# Altium PCB LCD16x2.PcbDoc
Units mil, origin at the board's own origin, x right, y up, seen from the top; angles counter-clockwise.
Board outline 3425.2 x 2755.91 mil, 2 copper layers (Top Layer, Bottom Layer); 10 components, 6 nets, 139 pads, 2 vias.
Unrouted connection lines stored in the file: 2.
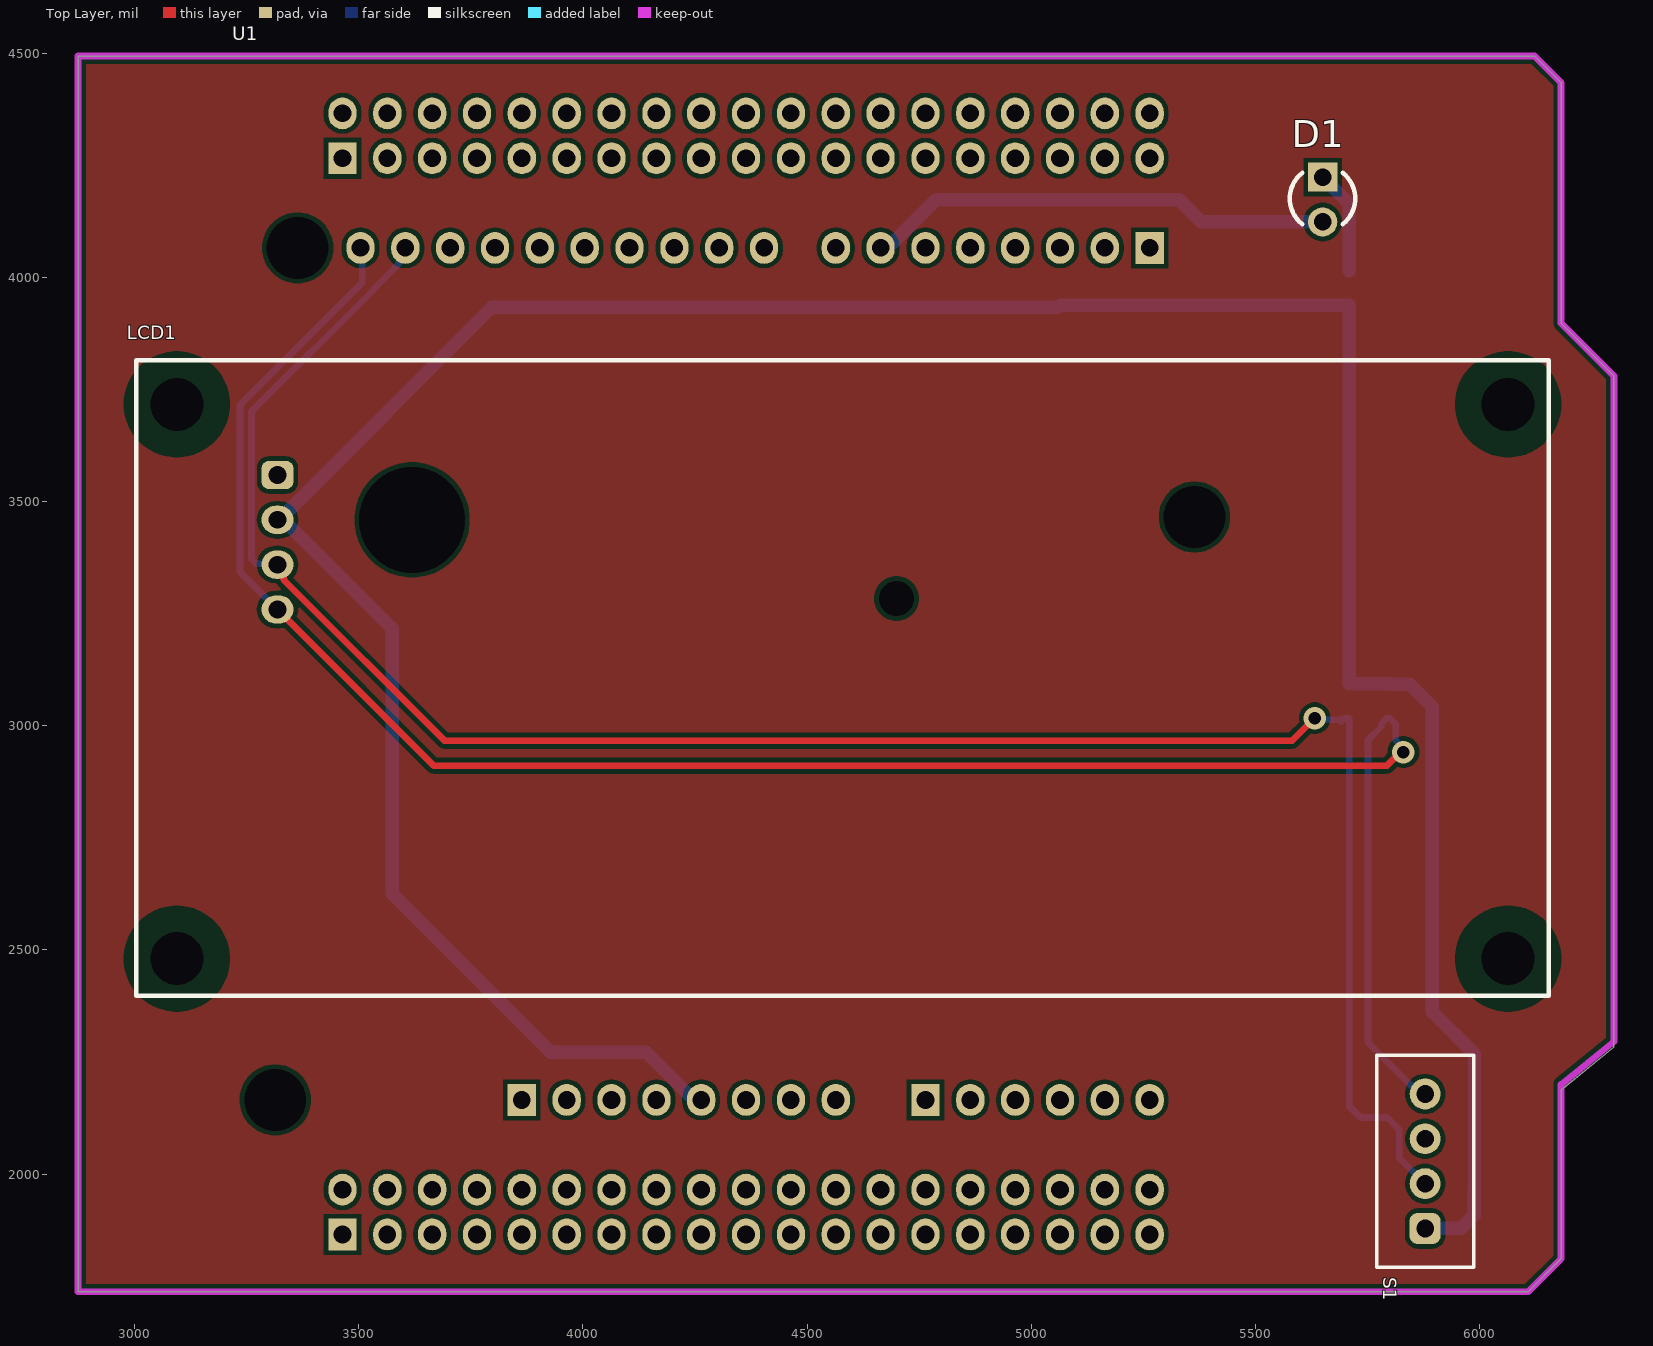
[diagram p0: Top Layer view]
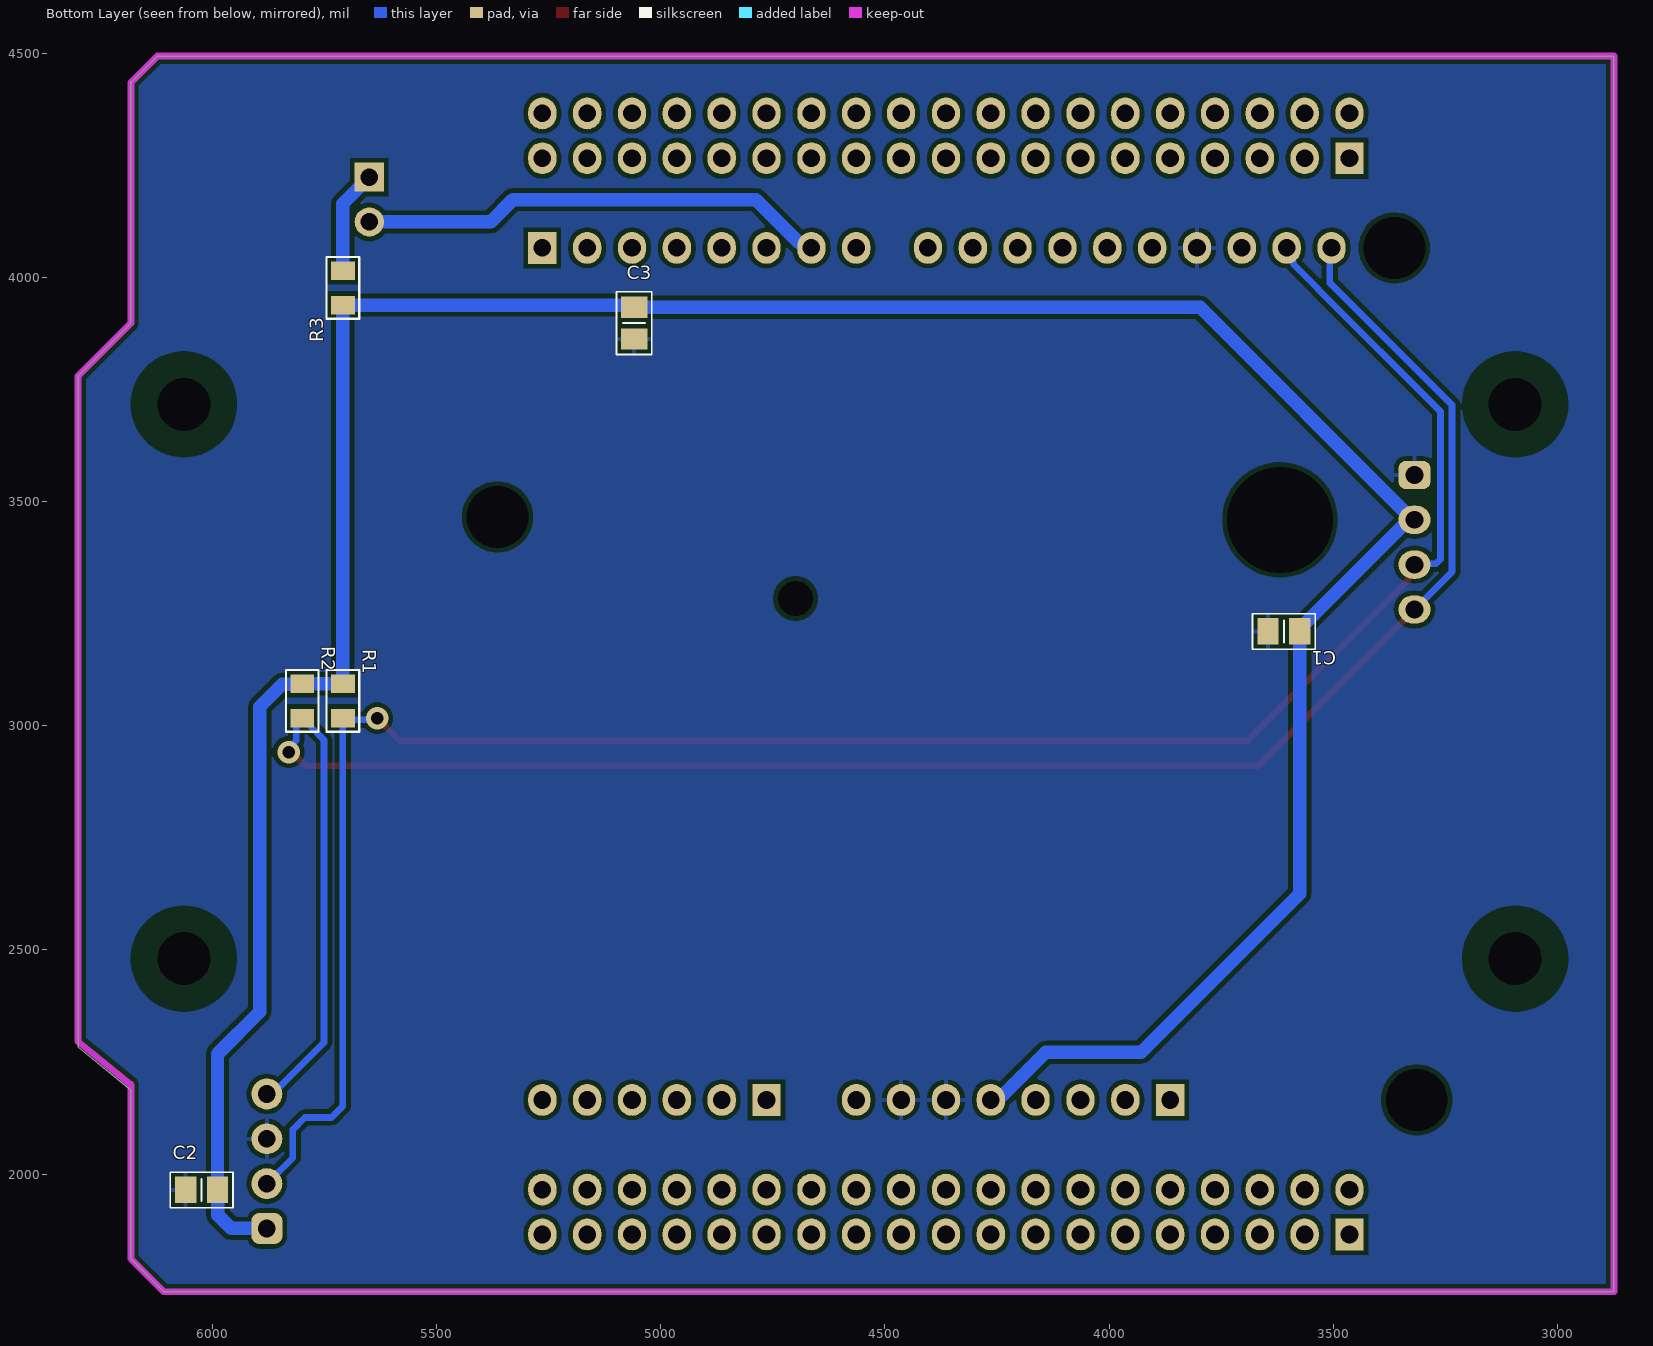
[diagram p1: Bottom Layer view, seen from below]
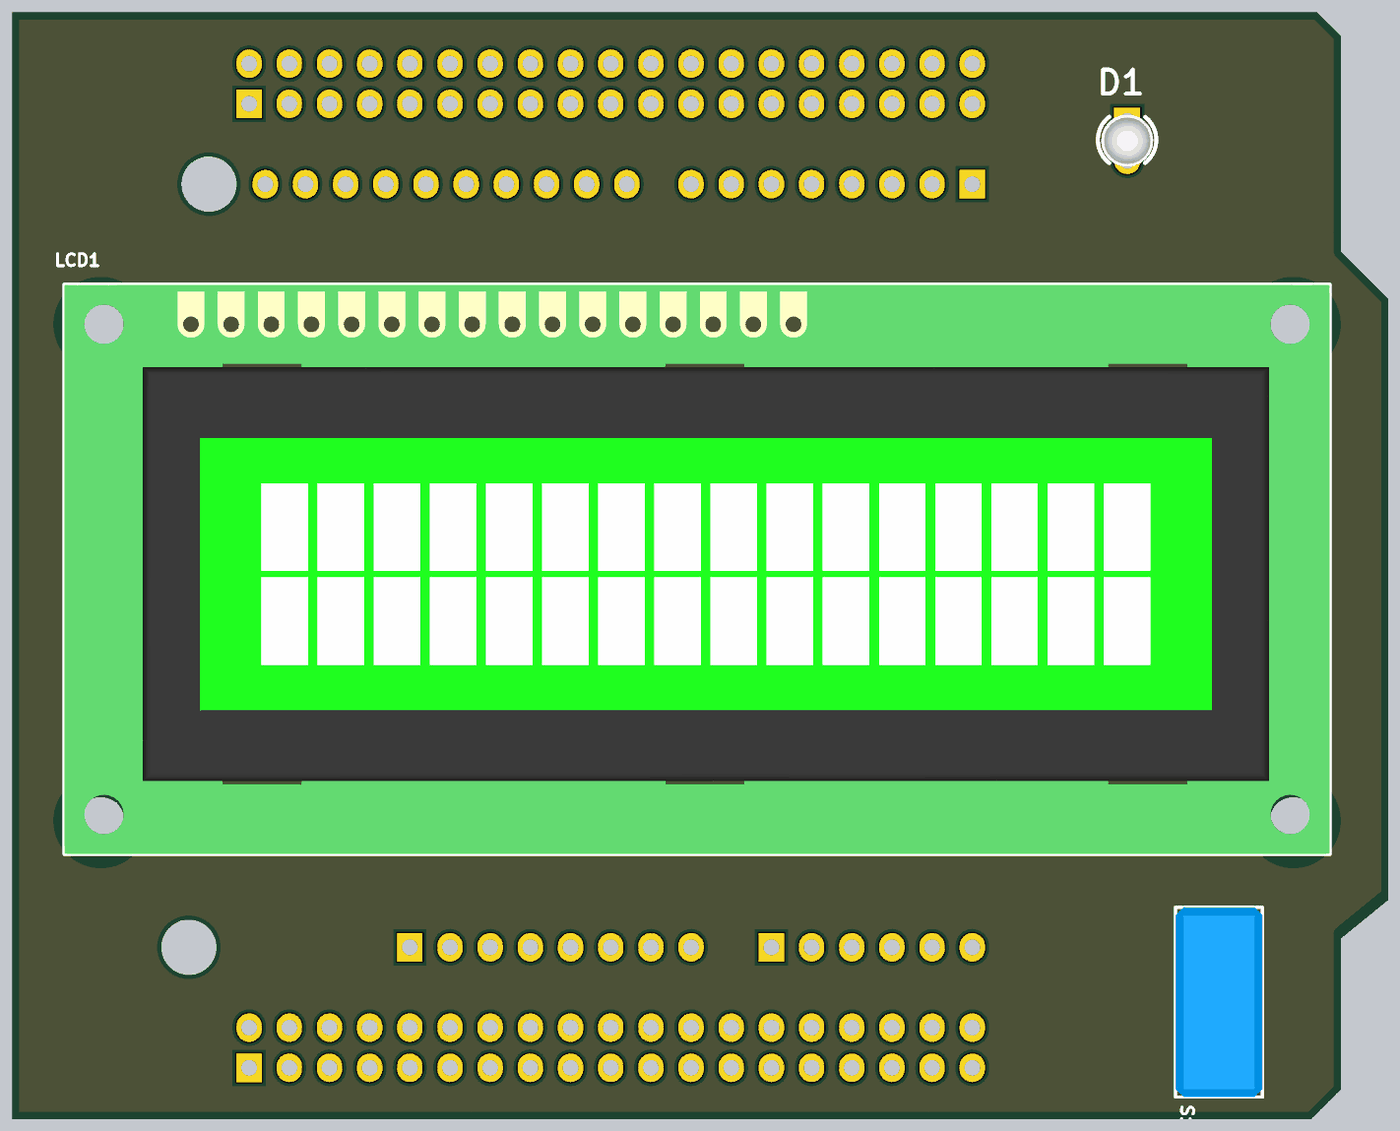
[diagram p2: 3D render of the assembled board from above, using the file's embedded part models]
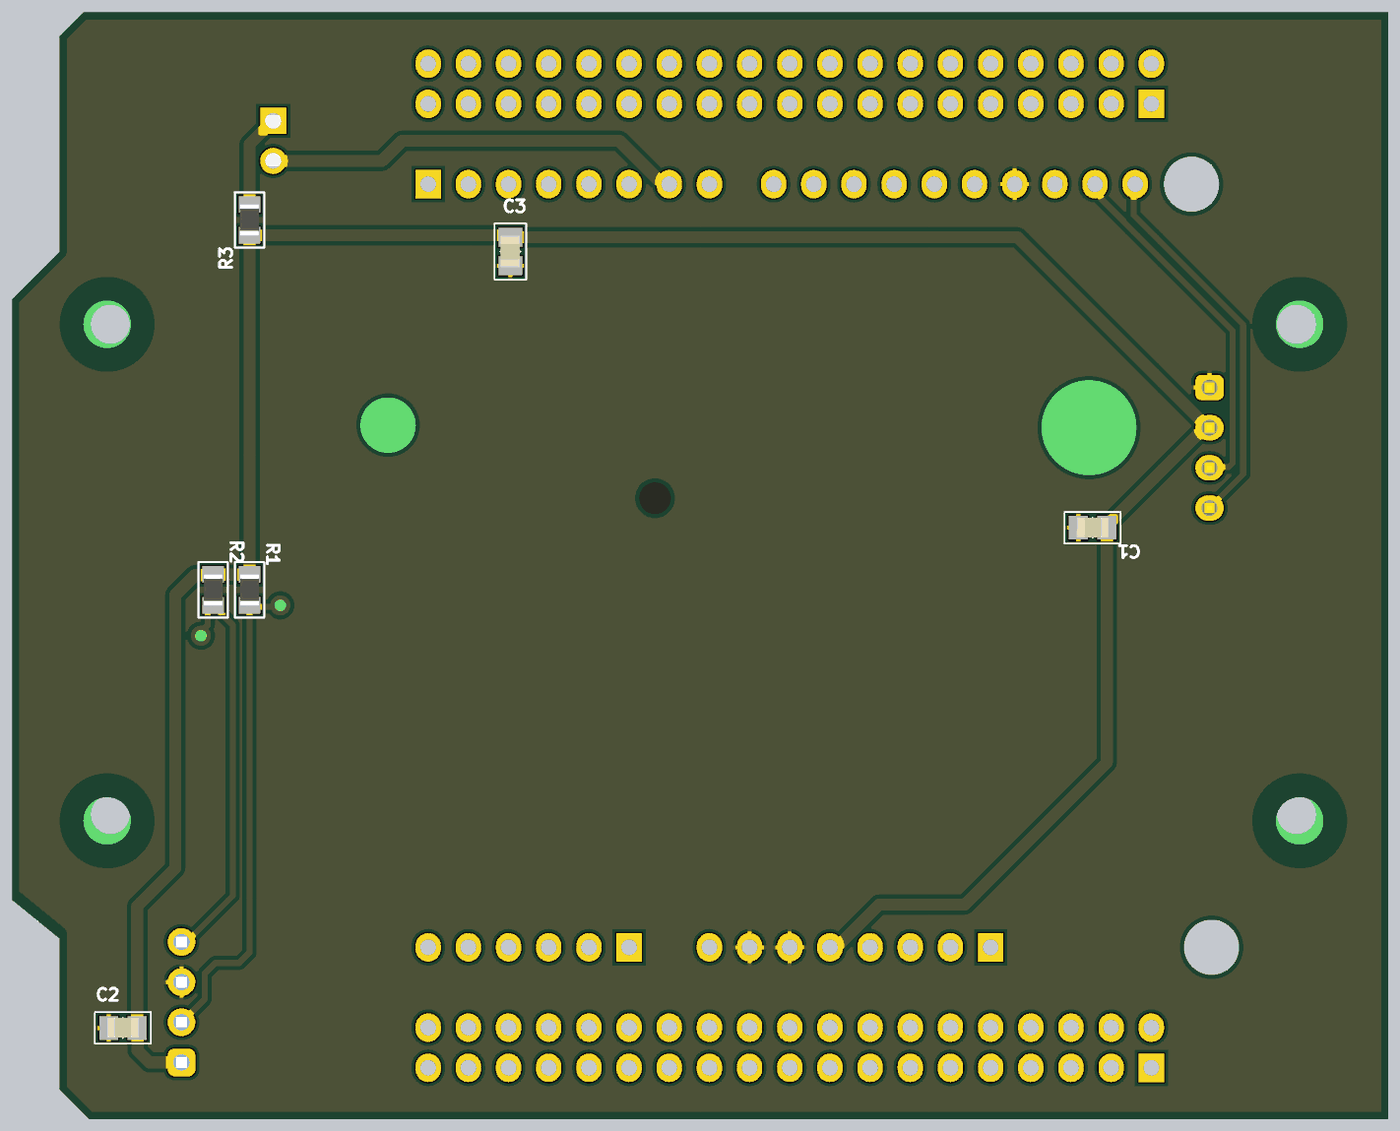
[diagram p3: 3D render of the assembled board from below, using the file's embedded part models]

## Layer stack, top to bottom
Top Solder: solder mask 0.4, Solder Resist, Dk 3.5
Top Layer: signal copper 1.4
Dielectric 1: dielectric 12.6, FR-4, Dk 4.8
Bottom Layer: signal copper 1.4
Bottom Solder: solder mask 0.4, Solder Resist, Dk 3.5

## Board outline
2874.02,1737.4 2874.02,4493.31 6122.24,4493.31 6181.1,4434.45 6181.1,3897.64 6299.21,3779.53 6299.21,2283.46 6181.1,2187.2 6181.1,1811.02 6107.48,1737.4

## Design rules (kind name [scope] priority, off if disabled: settings)
Clearance [All] p1: gap=10 ignorepadtopadclearanceinfootprint=FALSE except(0: Arc-Hole Track-Hole SMDPad-Hole THPad-Hole Via-Hole Fill-Hole Poly-Hole Region-Hole Text-Hole)
ComponentClearance [InComponent('H*') OR InComponent('S1')] p1: gap=0 collisioncheckmode=3 verticalgap=0 showdistances=FALSE
Height [All] p1: minheight=0 maxheight=1181.1 prefheight=500
PolygonConnect [All] p1: connectstyle=Relief reliefconductorwidth=10 reliefentries=4 polygonreliefangle="90 Angle" airgapwidth=10
RoutingVias [All] p1: holewidth=28 width=50 viastyle="Through Hole" minholewidth=28 minwidth=50 maxholewidth=28 maxwidth=50
SolderMaskExpansion [All] p1: expansion=4 istentingtop=FALSE
Width [All] p1: maxlimit=78.74 minlimit=7.87 preferedwidth=15.75 minimp=50.000000 maximp=50.000000 favimp=50.000000
28 further rules are at their usual default settings.

## Components (designator, comment, footprint, x,y, rotation, side; value= is the part's Value field where it differs from the comment)
C1 "100nF" "C 0805" 3610,3210 r0 bottom
C2 "100nF" "C 0805" 6023.62,1964.57 r0 bottom
C3 "100nF" "C 0805" 5059.06,3897.64 r270 bottom
D1 "Led" "LED 3MM - red" 5649.61,4173.23 r270 top
LCD1 "LCD 16x2" "LCD 1602A I2C" 4578.74,3092.52 r0 top locked
R1 "5k" "R 0805" 5708.66,3055.12 r90 bottom
R2 "5k" "R 0805" 5799.21,3055.12 r90 bottom
R3 "220" "R 0805" 5708.66,3976.38 r270 bottom
S1 "DHT20" DTH20 5877.95,2028.74 r90 top locked
U1 "NUCLEO-F103RB" NUCLEO 5383.46,1737.4 r90 top locked

## Footprints (in the part's own frame and the unit in brackets; to place one, negate y for a bottom-side part, rotate by r counter-clockwise, add the part's x,y. Pads: shape width x height; smd on the part's side, far side on the other; paste and mask are expansions set on the pad)
"C 0805" [mm] "Chip Capacitor, 2-Leads, Body 2.0x1.3mm, IPC Medium Density"
  rect 1.2x1.5 smd: 1(-0.9,0) 2(0.9,0)
  silkscreen extent -1.78,-1 1.78,1, body extent -1,-0.64 1,0.61, height 0.6
DTH20 [mm] "Temperature and humidity module DTH20"
  rrect50% 1.75x1.75 hole 1: 1(-3.81,0)
  round 1.75 hole 1: 2(-1.27,0) 3(1.27,0) 4(3.81,0)
  silkscreen extent -6,-2.75 6,2.75, body extent -6,-2.75 6,2.75, height 15.75
"LCD 1602A I2C" [mm]
  rrect50% 1.8x1.6 hole 1: 1(-32,11.85)
  oval 1.8x1.6 hole 1: 2(-32,9.31) 3(-32,6.77) 4(-32,4.23)
  round 0 hole 6 unplated: HOLE(-24.38,9.31)
  round 0 hole 2 unplated: HOLE(3.06,4.85)
  round 0 hole 3 unplated: HOLG(37.7,-15.55) HOLH(-37.7,-15.55) HOLH(-37.7,15.85) HOLH(37.7,15.85)
  Top Layer pour cut-out: 34.7,-15.55 34.928,-16.698 35.579,-17.671 36.552,-18.322 37.7,-18.55 37.7,-18.55 38.848,-18.322 39.821,-17.671 40.472,-16.698 40.7,-15.55 40.7,-15.55 40.472,-14.402 39.821,-13.429 38.848,-12.778 37.7,-12.55 37.7,-12.55 36.552,-12.778 35.579,-13.429 34.928,-14.402 34.7,-15.55
  Top Layer pour cut-out: -40.7,-15.55 -40.472,-16.698 -39.821,-17.671 -38.848,-18.322 -37.7,-18.55 -37.7,-18.55 -36.552,-18.322 -35.579,-17.671 -34.928,-16.698 -34.7,-15.55 -34.7,-15.55 -34.928,-14.402 -35.579,-13.429 -36.552,-12.778 -37.7,-12.55 -37.7,-12.55 -38.848,-12.778 -39.821,-13.429 -40.472,-14.402 -40.7,-15.55
  Top Layer pour cut-out: -40.7,15.85 -40.472,14.702 -39.821,13.729 -38.848,13.078 -37.7,12.85 -37.7,12.85 -36.552,13.078 -35.579,13.729 -34.928,14.702 -34.7,15.85 -34.7,15.85 -34.928,16.998 -35.579,17.971 -36.552,18.622 -37.7,18.85 -37.7,18.85 -38.848,18.622 -39.821,17.971 -40.472,16.998 -40.7,15.85
  Top Layer pour cut-out: 34.7,15.85 34.928,14.702 35.579,13.729 36.552,13.078 37.7,12.85 37.7,12.85 38.848,13.078 39.821,13.729 40.472,14.702 40.7,15.85 40.7,15.85 40.472,16.998 39.821,17.971 38.848,18.622 37.7,18.85 37.7,18.85 36.552,18.622 35.579,17.971 34.928,16.998 34.7,15.85
  Bottom Layer pour cut-out: 34.7,-15.55 34.928,-16.698 35.579,-17.671 36.552,-18.322 37.7,-18.55 37.7,-18.55 38.848,-18.322 39.821,-17.671 40.472,-16.698 40.7,-15.55 40.7,-15.55 40.472,-14.402 39.821,-13.429 38.848,-12.778 37.7,-12.55 37.7,-12.55 36.552,-12.778 35.579,-13.429 34.928,-14.402 34.7,-15.55
  Bottom Layer pour cut-out: -40.7,-15.55 -40.472,-16.698 -39.821,-17.671 -38.848,-18.322 -37.7,-18.55 -37.7,-18.55 -36.552,-18.322 -35.579,-17.671 -34.928,-16.698 -34.7,-15.55 -34.7,-15.55 -34.928,-14.402 -35.579,-13.429 -36.552,-12.778 -37.7,-12.55 -37.7,-12.55 -38.848,-12.778 -39.821,-13.429 -40.472,-14.402 -40.7,-15.55
  Bottom Layer pour cut-out: -40.7,15.85 -40.472,14.702 -39.821,13.729 -38.848,13.078 -37.7,12.85 -37.7,12.85 -36.552,13.078 -35.579,13.729 -34.928,14.702 -34.7,15.85 -34.7,15.85 -34.928,16.998 -35.579,17.971 -36.552,18.622 -37.7,18.85 -37.7,18.85 -38.848,18.622 -39.821,17.971 -40.472,16.998 -40.7,15.85
  Bottom Layer pour cut-out: 34.7,15.85 34.928,14.702 35.579,13.729 36.552,13.078 37.7,12.85 37.7,12.85 38.848,13.078 39.821,13.729 40.472,14.702 40.7,15.85 40.7,15.85 40.472,16.998 39.821,17.971 38.848,18.622 37.7,18.85 37.7,18.85 36.552,18.622 35.579,17.971 34.928,16.998 34.7,15.85
  silkscreen extent -40,-17.65 40,18.35, body extent -40.61,-18.1 40.62,18.4, height 22
"LED 3MM - red" [mil]
  rect 65x65 hole 39: 1(-50,0)
  round 65 hole 39: 2(50,0)
  silkscreen extent -60,-73 55,72, body extent -66,-65 64,65, height 207
NUCLEO [mm]
  oval 1.8x1.6 hole 1: A5_1(59.13,24.88) A5_2(59.13,27.42) A5_3(59.13,29.96) A5_4(59.13,32.5) A5_5(59.13,35.04) A5_6(59.13,37.58) A5_7(59.13,40.12) A5_8(59.13,42.66) A5_9(59.13,45.2) A5_10(59.13,47.74) A6_2(10.87,36.06) A6_3(10.87,33.52) A6_4(10.87,30.98) A6_5(10.87,28.44) A6_6(10.87,25.9) A6_7(10.87,23.36) A6_8(10.87,20.82) A8_2(10.87,13.2) A8_3(10.87,10.66) A8_4(10.87,8.12) A8_5(10.87,5.58) A8_6(10.87,3.04) A9_2(59.13,5.58) A9_3(59.13,8.12) A9_4(59.13,10.66) A9_5(59.13,13.2) A9_6(59.13,15.74) A9_7(59.13,18.28) A9_8(59.13,20.82) M7_2(5.79,48.76) M7_3(3.25,46.22) M7_4(5.79,46.22) M7_5(3.25,43.68) M7_6(5.79,43.68) M7_7(3.25,41.14) M7_8(5.79,41.14) M7_9(3.25,38.6) M7_10(5.79,38.6) M7_11(3.25,36.06) M7_12(5.79,36.06) M7_13(3.25,33.52) M7_14(5.79,33.52) M7_15(3.25,30.98) M7_16(5.79,30.98) M7_17(3.25,28.44) M7_18(5.79,28.44) M7_19(3.25,25.9) M7_20(5.79,25.9) M7_21(3.25,23.36) M7_22(5.79,23.36) M7_23(3.25,20.82) M7_24(5.79,20.82) M7_25(3.25,18.28) M7_26(5.79,18.28) M7_27(3.25,15.74) M7_28(5.79,15.74) M7_29(3.25,13.2) M7_30(5.79,13.2) M7_31(3.25,10.66) M7_32(5.79,10.66) M7_33(3.25,8.12) M7_34(5.79,8.12) M7_35(3.25,5.58) M7_36(5.79,5.58) M7_37(3.25,3.04) M7_38(5.79,3.04) M10_2(66.75,48.76) M10_3(64.21,46.22) M10_4(66.75,46.22) M10_5(64.21,43.68) M10_6(66.75,43.68) M10_7(64.21,41.14) M10_8(66.75,41.14) M10_9(64.21,38.6) M10_10(66.75,38.6) M10_11(64.21,36.06) M10_12(66.75,36.06) M10_13(64.21,33.52) M10_14(66.75,33.52) M10_15(64.21,30.98) M10_16(66.75,30.98) M10_17(64.21,28.44) M10_18(66.75,28.44) M10_19(64.21,25.9) M10_20(66.75,25.9) M10_21(64.21,23.36) M10_22(66.75,23.36) M10_23(64.21,20.82) M10_24(66.75,20.82) M10_25(64.21,18.28) M10_26(66.75,18.28) M10_27(64.21,15.74) M10_28(66.75,15.74) M10_29(64.21,13.2) M10_30(66.75,13.2) M10_31(64.21,10.66) M10_32(66.75,10.66) M10_33(64.21,8.12) M10_34(66.75,8.12) M10_35(64.21,5.58) M10_36(66.75,5.58) M10_37(64.21,3.04) M10_38(66.75,3.04)
  rect 1.8x1.6 hole 1: A6_1(10.87,38.6) A8_1(10.87,15.74) A9_1(59.13,3.04) M7_1(3.25,48.76) M10_1(64.21,48.76)
  round 0 hole 3.5 unplated: HOLD(10.87,52.57) HOLD(43.89,0.5) HOLD(59.13,51.3)
  Keep-Out Layer lines w0.381: 11.74,-20.26 1.87,-20.26 0,-18.39 0,63.74 70,63.74 70,-18.765 68.505,-20.26 54.87,-20.26 51.87,-23.26 14.185,-23.26
"R 0805" [mm] "Chip Resistor, 2-Leads, Body 2.0x1.3mm, IPC Medium Density"
  rect 1.05x1.35 smd: 1(-0.975,0) 2(0.975,0)
  silkscreen extent -1.75,-0.92 1.75,0.92, body extent -1,-0.61 1,0.59, height 0.5

## Part data
C1 C2 C3: library part "Capacitor NP", "Capacitor non-pol"
D1: "Typical LED"
LCD1: "Character LCD 16x2"
R1 R2 R3: library part Resistor, "Resistor"
S1: library part DTH20, "DTH20 Temperature and humidity module"
U1: "STM32F103RB, mbed-Enabled Development Nucleo-64 STM32F1 ARM® Cortex®-M3 MCU 32-Bit Embedded Evaluation Board", Manufacturer=STMicroelectronics, BRAND=STMicroelectronics, Manufacturer Product Number=NUCLEO-F103RB, PART NO=NUCLEO-F103RB, STOCK CODE=497-14362-ND, SUPPLIER=digi-key, TYPE="EVAL BRD"

## Via types
v1: diameter 50, hole 28, Top Layer to Bottom Layer, tented top, 2 vias

## Nets (pads, with @x,y where several pads share a name; then routed paths per layer and width w, separated by ;. In a path a pad name is that pad's centre, name@x,y a point inside that pad or via, vN(x,y) a via of type N, cw(c..) or ccw(c..) an arc to the next point about the centre after c; other vN are vias at no path point)
+5: C1.1 C2.1 C3.1 LCD1.2 R1.2 R2.2 R3.2 S1.1 U1.A6_5 | length 6752.9
  Bottom Layer w30: LCD1.2 LCD1.2@3331.42,3459.06 ; U1.A6_5 4253.53,2175.6 4237.36,2175.6 4141.31,2271.65 3928.35,2271.65 3574.57,2625.43 C1.1 3574.57,3215.91 LCD1.2@3331.42,3459.06 ; S1.1 5957.4,1878.74 5987.31,1908.65 5987.31,1963.69 C2.1 5988.19,2267.72 5893.7,2362.2 5893.7,3042.19 5843.53,3092.36 5800.36,3092.36 R2.2 R1.2 R3.2 5063.98,3937.99 C3.1 3796.85,3933.07 3331.42,3467.64 LCD1.2@3331.42,3459.06
GND: C1.2 C2.2 C3.2 LCD1.1 S1.3 U1.A5_7 U1.A6_6 U1.A6_7
LED: D1.2 U1.A9_7 | length 1051.2
  Bottom Layer w30: U1.A9_7 4674.03,4075.6 4690.2,4075.6 4787.82,4173.23 5329.17,4173.23 5379.17,4123.23 D1.2
NetD1_1: D1.1 R3.1 | length 232.9
  Bottom Layer w30: D1.1 5708.66,4164.17 R3.1
SCL: LCD1.4 R2.1 S1.4 U1.A5_10 | length 4633.4
  Top Layer w15: LCD1.4 3667.09,2910.86 5792.79,2910.86 5823.08,2941.15 v1(5829.68,2941.15)
  Bottom Layer w15: LCD1.4 3235,3342.95 3235,3715.4 3508.02,3988.43 3508.02,4061.27 U1.A5_10 ; v1(5829.68,2941.15) 5829.68,2950.13 5812.38,2967.43 5812.38,3003.57 R2.1 5793.31,3016.73 5780.14,3003.56 5780.14,2997.66 5750.55,2968.07 5750.55,2293.39 5865.2,2178.74 S1.4
SDA: LCD1.3 R1.1 S1.2 U1.A5_9 | length 4631.2
  Top Layer w15: LCD1.3 3332.02,3345.94 3332.02,3327.33 3333.88,3325.47 3333.88,3323.74 3691.06,2966.56 5581.8,2966.56 v1(5631.97,3016.73)
  Bottom Layer w15: LCD1.3 3316.65,3361.3 3270.85,3361.3 3261.06,3371.09 3261.06,3700.24 3533.53,3972.72 3533.53,3974.08 3589.22,4029.77 3589.22,4033.71 3604.99,4049.49 U1.A5_9@3604.99,4064.3 ; v1(5631.97,3016.73) 5635.41,3013.29 R1.1@5691.11,3013.29 ; R1.1@5691.11,3008.77 5699.07,3016.73 R1.1 5708.66,2151.82 5734.14,2126.34 5793.66,2126.34 5820.21,2099.79 5820.21,2036.49 S1.2
pads on no net: LCD1.HOLE LCD1.HOLG LCD1.HOLH U1.A5_1 U1.A5_2 U1.A5_3 U1.A5_4 U1.A5_5 U1.A5_6 U1.A5_8 U1.A6_1 U1.A6_2 U1.A6_3 U1.A6_4 U1.A6_8 U1.A8_1 U1.A8_2 U1.A8_3 U1.A8_4 U1.A8_5 U1.A8_6 U1.A9_1 U1.A9_2 U1.A9_3 U1.A9_4 U1.A9_5 U1.A9_6 U1.A9_8 U1.HOLD U1.M7_1 U1.M7_2 U1.M7_3 U1.M7_4 U1.M7_5 U1.M7_6 U1.M7_7 U1.M7_8 U1.M7_9 U1.M7_10 U1.M7_11 U1.M7_12 U1.M7_13 U1.M7_14 U1.M7_15 U1.M7_16 U1.M7_17 U1.M7_18 U1.M7_19 U1.M7_20 U1.M7_21 U1.M7_22 U1.M7_23 U1.M7_24 U1.M7_25 U1.M7_26 U1.M7_27 U1.M7_28 U1.M7_29 U1.M7_30 U1.M7_31 U1.M7_32 U1.M7_33 U1.M7_34 U1.M7_35 U1.M7_36 U1.M7_37 U1.M7_38 U1.M10_1 U1.M10_2 U1.M10_3 U1.M10_4 U1.M10_5 U1.M10_6 U1.M10_7 U1.M10_8 U1.M10_9 U1.M10_10 U1.M10_11 U1.M10_12 U1.M10_13 U1.M10_14 U1.M10_15 U1.M10_16 U1.M10_17 U1.M10_18 U1.M10_19 U1.M10_20 U1.M10_21 U1.M10_22 U1.M10_23 U1.M10_24 U1.M10_25 U1.M10_26 U1.M10_27 U1.M10_28 U1.M10_29 U1.M10_30 U1.M10_31 U1.M10_32 U1.M10_33 U1.M10_34 U1.M10_35 U1.M10_36 U1.M10_37 U1.M10_38

## Polygon pours and split planes (outlines as drawn)
GND on Bottom Layer "NONET_L-01_P-001" (solid, remove dead copper, pour order 0): 2874.02,1744.09 2877.95,1740.16 6110.24,1740.16 6181.1,1811.02 6181.1,2196.85 6200.79,2196.85 6303.15,2299.21 6303.15,3783.46 6181.1,3905.51 6185.04,3909.45 6185.04,4437.01 6181.1,4437.01 6122.05,4496.06 2874.02,4496.06 2874.02,1740.16
no net on Top Layer "NONET_L-01_P-001" (solid, pour order 1): 2885.83,4496.06 6122.05,4496.06 6185.04,4433.07 6185.04,3893.7 6303.15,3775.59 6303.15,2299.21 6216.54,2212.6 6177.17,2212.6 6177.17,1814.96 6181.1,1811.02 6110.24,1740.16 2877.95,1740.16 2874.02,1744.09 2877.95,1748.03 2877.95,4488.19

## Keep-outs
Keep-Out Layer:
  lines w15: 6181.1,2199.61 6299.21,2295.87